# Altium PCB ESE516_PCB.PcbDoc (part 1 of 2)
Units mil, origin at the board's own origin, x right, y up, seen from the top; angles counter-clockwise.
Board outline 3149.61 x 3149.61 mil, 4 copper layers (Top Layer, GroundPlane, PowerPlane, Bottom Layer), stack 58.4 mil thick; 100 components, 68 nets, 304 pads, 8 vias.
Unrouted connection lines stored in the file: 178.
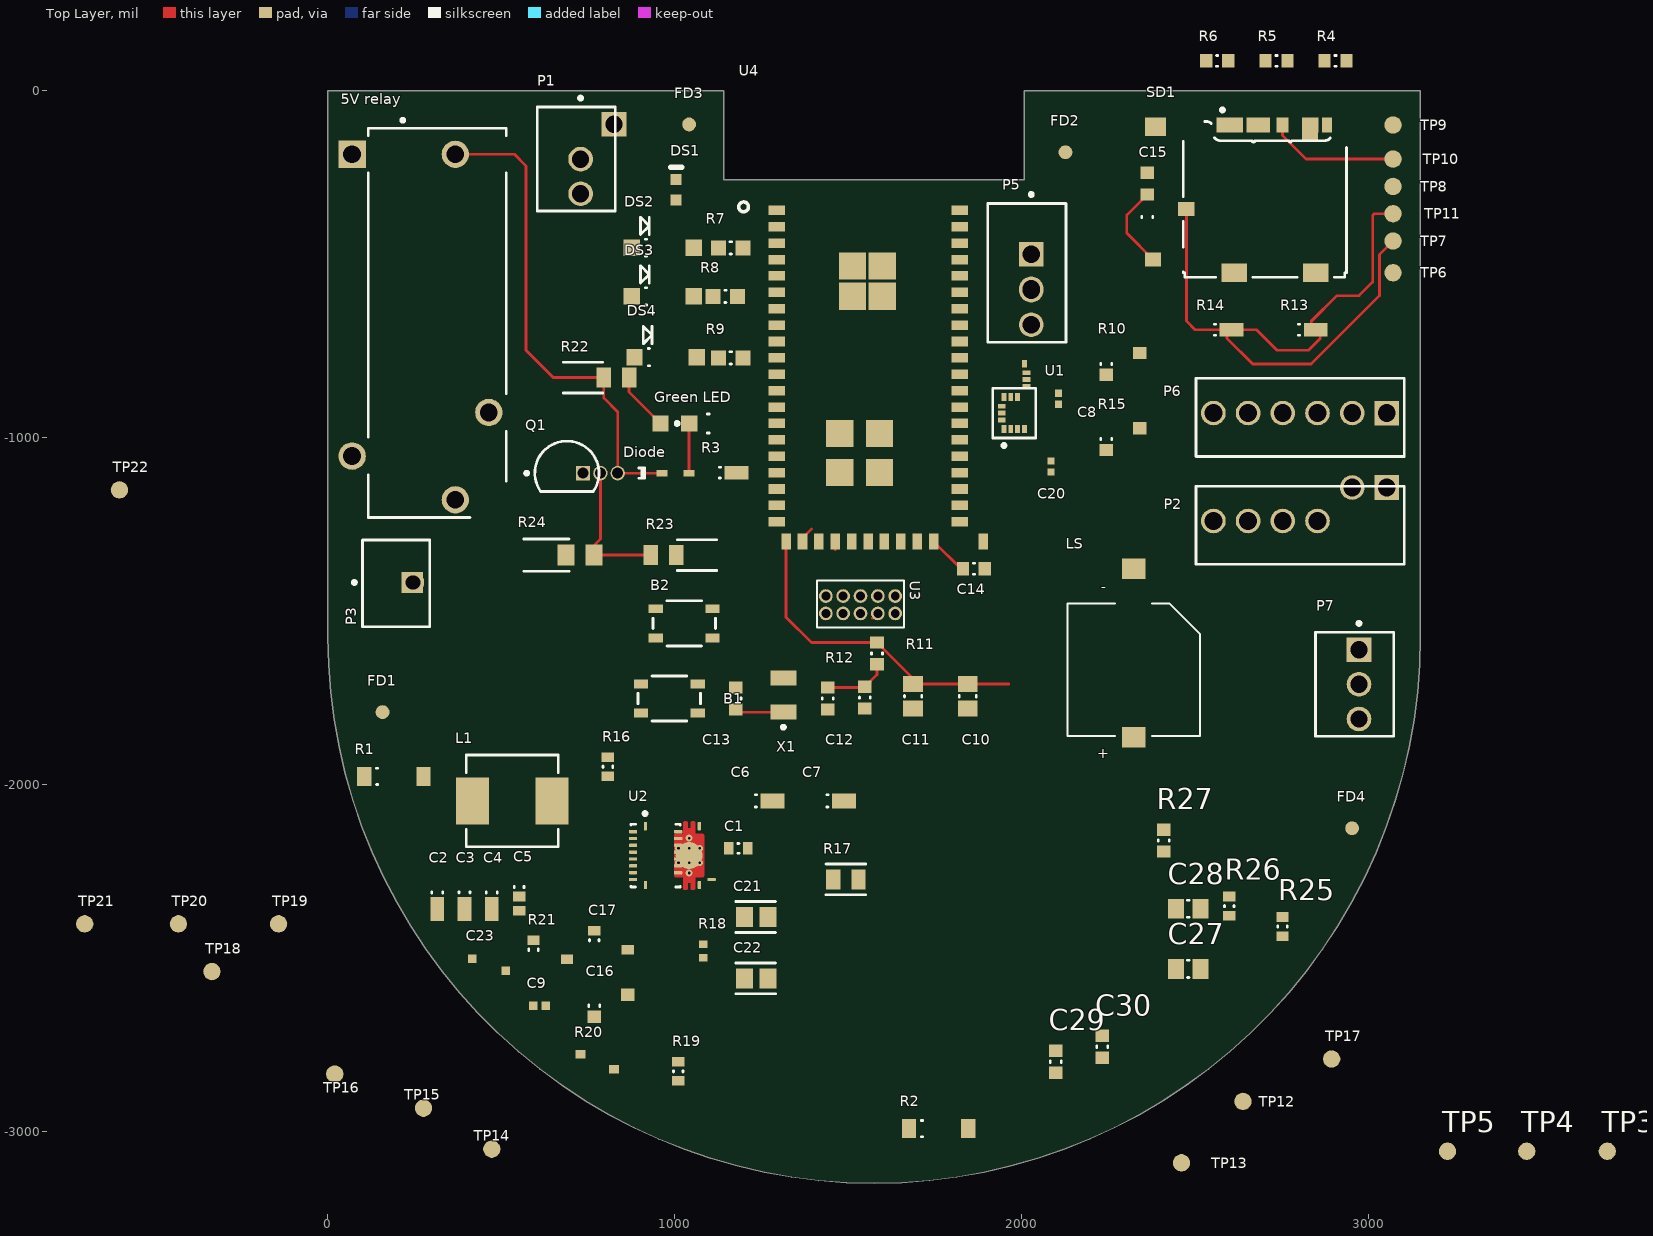
[diagram p0: Top Layer view]
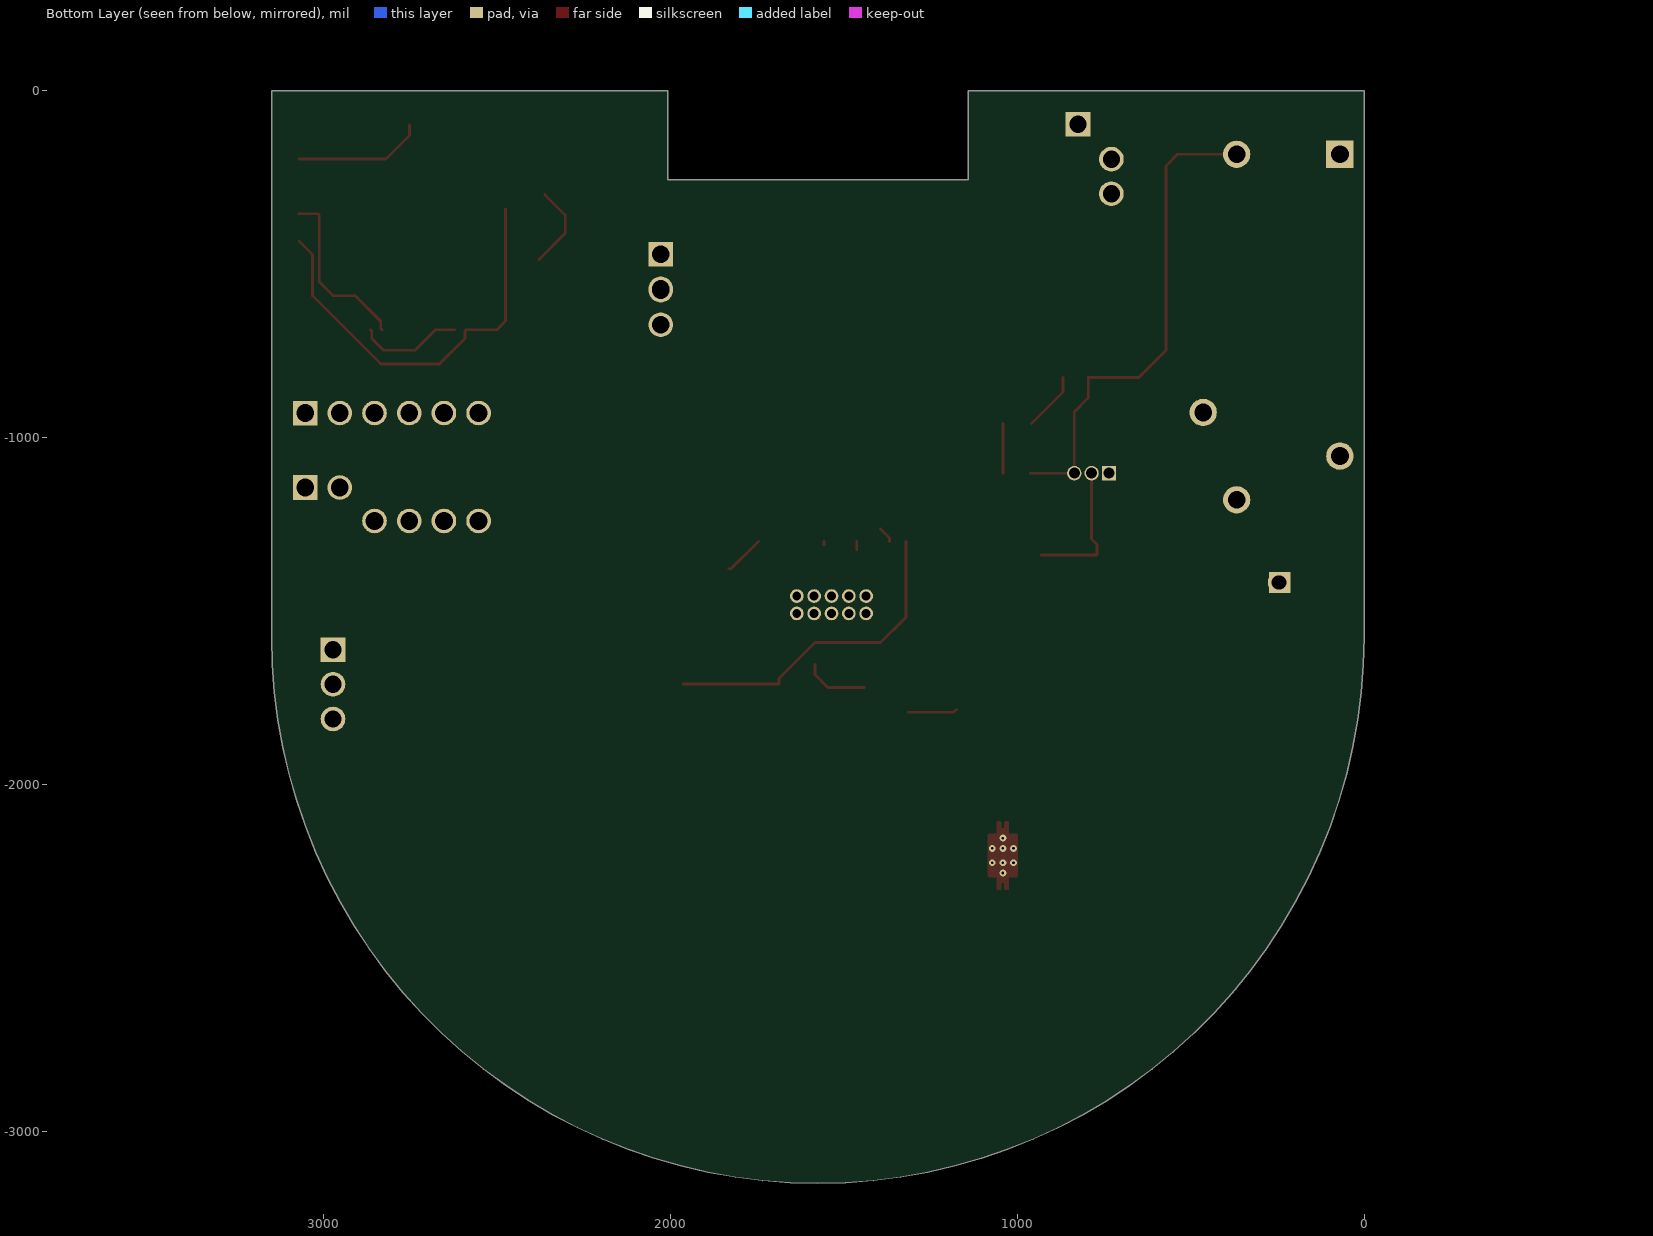
[diagram p1: Bottom Layer view, seen from below]
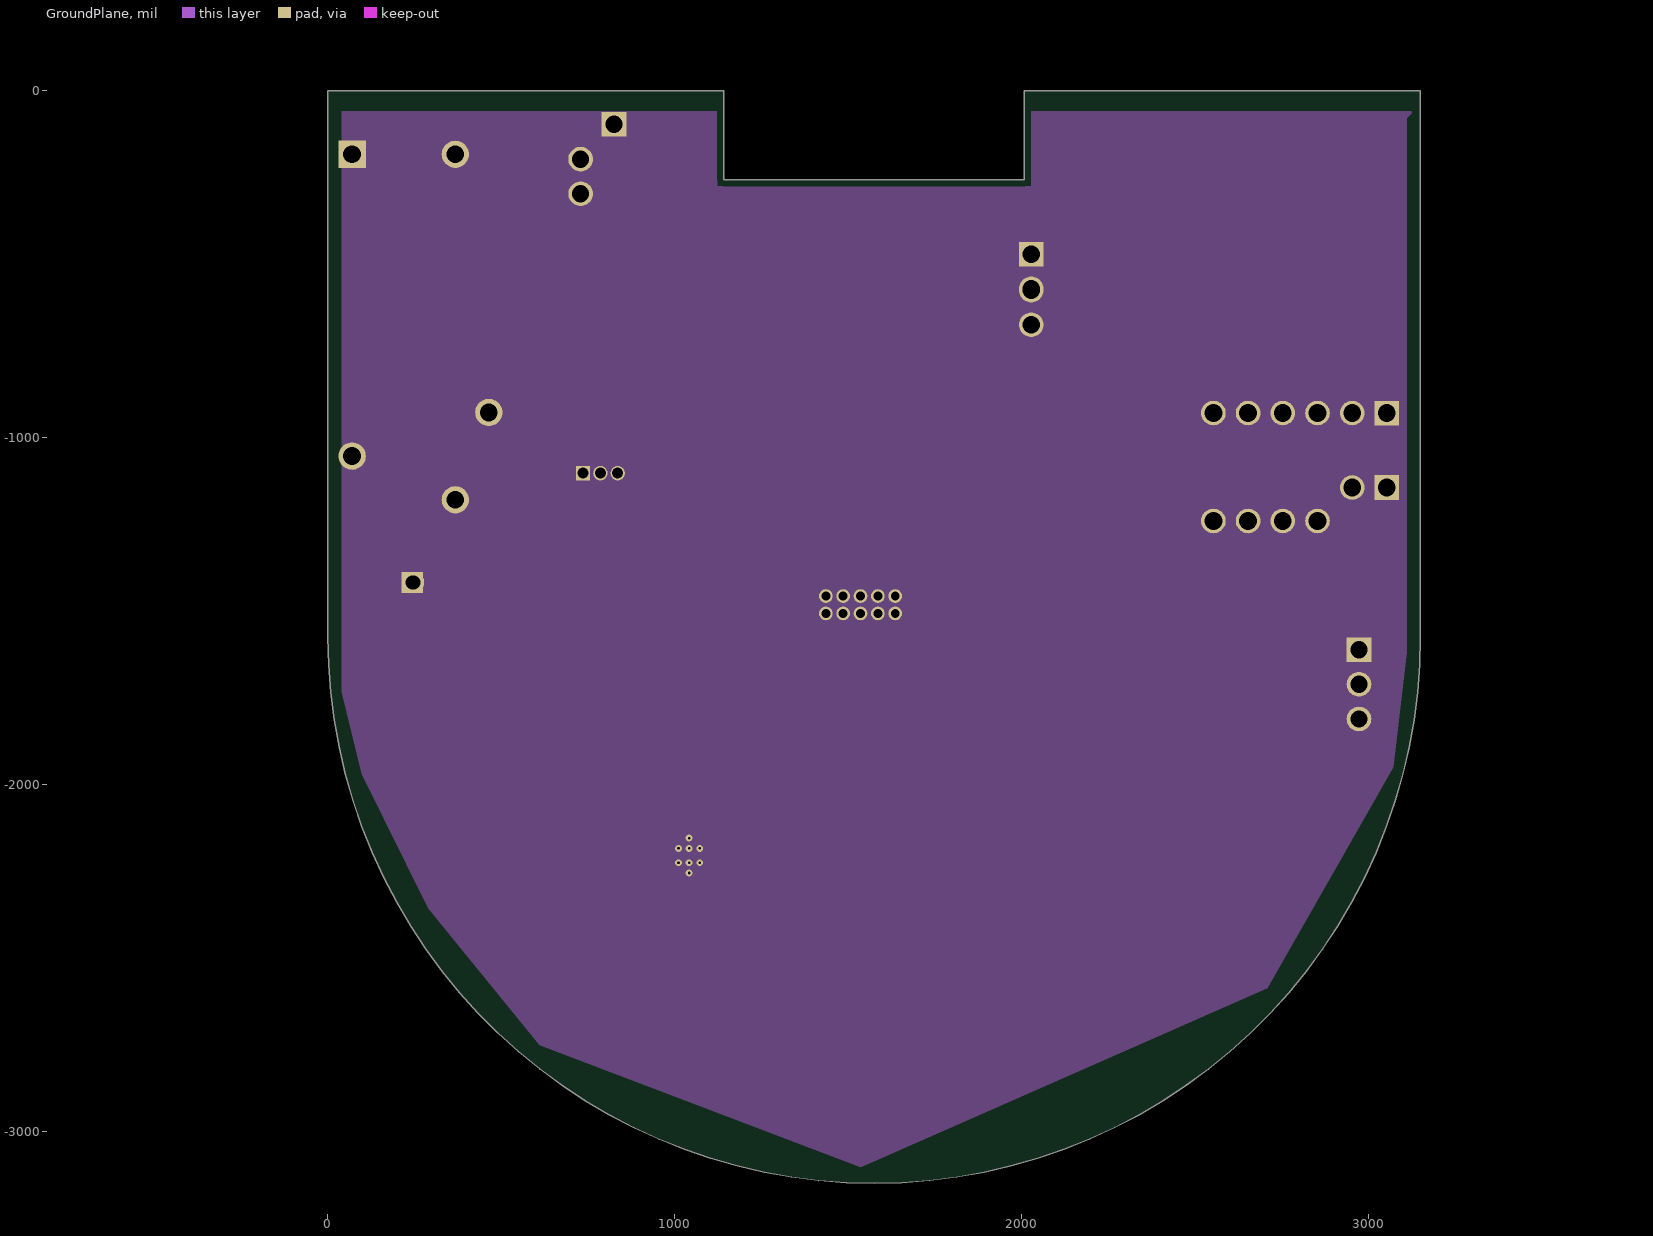
[diagram p2: GroundPlane]

## Layer stack, top to bottom
Top Solder: solder mask 1, Solder Resist, Dk 3.5
Top Layer: signal copper 1.5
Dielectric1: prepreg 13, PP-006, Dk 4.1
GroundPlane: signal copper 0.7
Dielectric 2: core 28, Core-009, Dk 4.5
PowerPlane: signal copper 0.7
Dielectric 3: prepreg 13, PP-006, Dk 4.1
Bottom Layer: signal copper 1.5
Bottom Solder: solder mask 1, Solder Resist, Dk 3.5

## Board outline
2007.87,-255.91 1141.73,-255.91 1141.73,0 0,0 0,-1574.8 2.02,-1654.57 8.08,-1734.12 18.16,-1813.27 32.24,-1891.81 50.27,-1969.53 72.22,-2046.24 98.03,-2121.74 127.62,-2195.84 160.94,-2268.34 197.88,-2339.06 238.35,-2407.82 282.26,-2474.44 329.49,-2538.75 379.91,-2600.59 433.4,-2659.79 489.81,-2716.21 549.02,-2769.7 610.86,-2820.12 675.17,-2867.34 741.79,-2911.25 810.55,-2951.73 881.27,-2988.67 953.77,-3021.98 1027.86,-3051.58 1103.36,-3077.39 1180.07,-3099.34 1257.8,-3117.37 1336.33,-3131.45 1415.48,-3141.53 1495.04,-3147.59 1574.8,-3149.61 1654.56,-3147.59 1734.12,-3141.53 1813.27,-3131.45 1891.81,-3117.37 1969.53,-3099.34 2046.24,-3077.39 2121.74,-3051.58 2195.83,-3021.98 2268.34,-2988.67 2339.06,-2951.73 2407.82,-2911.25 2474.44,-2867.34 2538.75,-2820.12 2600.58,-2769.7 2659.79,-2716.21 2716.21,-2659.79 2769.7,-2600.59 2820.12,-2538.75 2867.34,-2474.44 2911.25,-2407.82 2951.73,-2339.06 2988.67,-2268.34 3021.98,-2195.84 3051.58,-2121.74 3077.38,-2046.24 3099.33,-1969.53 3117.37,-1891.81 3131.44,-1813.27 3141.52,-1734.12 3147.58,-1654.57 3149.6,-1574.8 3149.6,0 2007.87,0

## Design rules (kind name [scope] priority, off if disabled: settings)
AcuteAngle [All] p1: minimum=6.00000000000000E+0001 checktracksonly=TRUE
AssemblyTestPointUsage [All] p1 off: allowmultiple=TRUE
AssemblyTestpoint [All] p1 off: testpointundercomponent=TRUE minsize=30 maxsize=100 preferedsize=60 minholesize=0 maxholesize=40 preferedholesize=32 testpointgrid=1 usegrid=FALSE gridtolerance=0.01 allowsidebottom=TRUE
BoardOutlineClearance "BoardOutlineClearance_Inner Layer" [OnLayer('GroundPlane')OR OnLayer('PowerPlane')] p1: gap=20 ignorepadtopadclearanceinfootprint=FALSE
BoardOutlineClearance BoardOutlineClearance_OuterLayers [All] p2: gap=10 ignorepadtopadclearanceinfootprint=FALSE except(20: SMDPad-OutlineEdge SMDPad-CavityEdge SMDPad-CutoutEdge THPad-OutlineEdge THPad-CavityEdge THPad-CutoutEdge)
Clearance [All] p1: gap=8 ignorepadtopadclearanceinfootprint=FALSE
DiffPairsRouting [All] p1: maxlimit=10 minlimit=6 mostfreqgap=10 toplayer_minwidth=6 toplayer_maxwidth=25 toplayer_prefwidth=15 midlayer1_minwidth=6 midlayer1_maxwidth=25 midlayer1_prefwidth=15 midlayer2_minwidth=6 midlayer2_maxwidth=25 midlayer2_prefwidth=15 bottomlayer_minwidth=6 bottomlayer_maxwidth=25 bottomlayer_prefwidth=15 maxuncoupledlength=500
FabricationTestPointUsage [All] p1 off: valid=0 allowmultiple=TRUE
FabricationTestpoint [All] p1 off: side=2 testpointundercomponent=TRUE minsize=30 maxsize=100 preferedsize=60 minholesize=0 maxholesize=40 preferedholesize=32 testpointgrid=1 allowsidebottom=TRUE usegrid=FALSE gridtolerance=0.01
HoleSize [All] p1: absolutevalues=TRUE maxlimit=150 minlimit=8 maxpercent=80.000 minpercent=20.000
MinimumAnnularRing [All] p1: minimumring=6
MinimumSolderMaskSliver [All] p1: minsoldermaskwidth=2
PlaneClearance [All] p1: clearance=10
PlaneConnect [All] p1: pad.planeconnectstyle=Relief pad.reliefexpansion=20 pad.reliefentries=4 pad.reliefconductorwidth=10 pad.reliefairgap=10 via.planeconnectstyle=Direct via.reliefexpansion=20 via.reliefentries=4 via.reliefconductorwidth=10 via.reliefairgap=10
PolygonConnect [All] p1: thpad.connectstyle=Relief thpad.reliefconductorwidth=10 thpad.reliefentries=4 thpad.polygonreliefangle="90 Angle" thpad.airgapwidth=8 smdpad.connectstyle=Relief smdpad.reliefconductorwidth=10 smdpad.reliefentries=4 smdpad.polygonreliefangle="90 Angle" smdpad.airgapwidth=8 via.connectstyle=Direct via.reliefconductorwidth=10 via.reliefentries=4 via.polygonreliefangle="90 Angle" via.airgapwidth=8
RoutingVias [All] p1: holewidth=8 width=20 viastyle="Through Hole" minholewidth=8 minwidth=20 maxholewidth=30 maxwidth=50
SMDNeckDown [All] p1: percent=90.000
SMDToCorner [All] p1: distance=0
SMDToPlane [All] p1: distance=0
SilkToSilkClearance [All] p1: silktosilkclearance=0
SilkToSolderMaskClearance [IsPad] p1: minsilkscreentomaskgap=2 clearancetoexposedcopper=TRUE
SolderMaskExpansion [All] p1: expansion=2 istentingtop=FALSE
UnRoutedNet [All] p1: checkbadconnections=TRUE
ViasUnderSMD [All] p1: allowed=FALSE
Width [All] p1: maxlimit=20 minlimit=6 preferedwidth=8
18 further rules are at their usual default settings.

## Classes and differential pairs
component class U_Solenoid: "5V relay" Diode "Green LED" P3 Q1 R22 R23 R24
component class U_IMU_LSM6DSOTR: C8 C20 U1
component class U_12V6_Boost: C1 C2 C3 C4 C5 C6 C7 C9 C16 C17 C21 C22 C23 L1 R16 R17 R18 R19 R20 R21 U2
component class U_3V3_BUCK: C27 C28 C29 C30 R25 R26 R27 TP17
component class U_Memory: C15 R13 R14 SD1 TP6 TP7 TP8 TP9 TP10 TP11
component class U_MCU: B1 C10 C11 C12 C13 C14 P6 P7 R11 R12 TP12 TP13 TP14 TP15 TP16 U3 U4 X1
component class MAIN: B2 DS1 DS2 DS3 DS4 FD1 FD2 FD3 FD4 LS P1 P2 P5 R1 R2 R3 R4 R5 R6 R7 R8 R9 R10 R15 TP3 TP4 TP5 TP18 TP19 TP20 TP21 TP22

## Components (designator, comment, footprint, x,y, rotation, side; value= is the part's Value field where it differs from the comment)
"5V relay" "5-1393224-2" FP-5-1393224-2-MFG 314.96,-669.29 r270 top
B1 "PTS810 SJK 250 SMTR LFS" "PTS810 SJK 250 SMTR LFS" 984.25,-1751.97 r0 top
B2 "PTS810 SJK 250 SMTR LFS" "PTS810 SJK 250 SMTR LFS" 1027.19,-1535.43 r0 top
C1 "100nF 10V" CAPC0603(1608)100_L#1 1183.1,-2184.06 r0 top value=100nF
C2 "10uF 10V" CAPC0603(1608)100_N#1 314.96,-2311.02 r270 top value=10uF
C3 "10uF 10V" CAPC0603(1608)100_N#1 393.7,-2311.02 r270 top value=10uF
C4 "10uF 10V" CAPC0603(1608)100_N#1 472.44,-2311.02 r270 top value=10uF
C5 "100nF 10V" CAPC0603(1608)100_L#2 551.18,-2295.28 r270 top value=100nF
C6 "1uF 10V" CAPC0603(1608)100_M 1233.74,-2047.24 r0 top value=1uF
C7 "1uF 10V" CAPC0603(1608)100_M 1439.74,-2047.24 r0 top value=1uF
C8 "100nF 10V" CAPC0402(1005)60_L#1 2106.3,-984.25 r90 top value=100nF
C9 "120pF 16V" CAPC0402(1005)60_N#1 610.24,-2637.8 r0 top value=120pF
C10 "10uF 16V" CAPC0805(2012)145_N 1844.52,-1745.5 r90 top value=10uF
C11 "CAP 10uF 16V" CAPC0805(2012)145_N 1687.04,-1745.5 r90 top value=10uF
C12 "1uF 16V" CAPC0603(1608)100_N#2 1441.01,-1751.97 r90 top value=1uF
C13 "18pF 16V" CAPC0603(1608)100_N#2 1175.23,-1751.97 r270 top value=18pF
C14 "18pF 16V" CAPC0603(1608)100_N#2 1862.2,-1377.95 r180 top value=18pF
C15 "CAP 100nF 16V 0603(1608)" CAPC0603(1608)100_N#3 2362.2,-364.14 r90 top value=100nF
C16 "CAP 8.2nF 10V 0603(1608)" CAPC0603(1608)100_N#4 767.72,-2637.8 r90 top value=8.2nF
C17 "1.2nF 10V" CAPC0603(1608)100_L#3 767.72,-2448.82 r90 top value=1.2nF
C20 "100nF 10V" CAPC0402(1005)60_L#2 1988.19,-1082.68 r90 top value=100nF
C21 "10uF 16V" FP-CL21-IPC_B 1233.3,-2381.89 r0 top
C22 "10uF 16V" FP-CL21-IPC_B 1233.3,-2559.06 r0 top
C23 "120pF 16V" CAPC0402(1005)60_N#2 416.5,-2519.68 r90 top value=120pF
C27 "22uF 10V" CAPC0805(2012)145_N 2480.32,-2531.46 r0 top value=22uF
C28 "22uF 10V" CAPC0805(2012)145_N 2480.31,-2358.27 r0 top value=22uF
C29 "10nF 16V" CAPC0603(1608)100_N#2 2098.43,-2799.21 r90 top value=10nF
C30 "3.9nF 16V" CAPC0603(1608)100_N#2 2232.28,-2755.91 r90 top value=3.9nF
Diode "1N4148WT" FAIR-SOD-523F-2_V 905.51,-1102.36 r180 top
DS1 "LTST-C191KGKT" LITE-ON-LTST-C191KRKT-2_V 1003.94,-285.43 r90 top
DS2 "" LTST-C170GKT_V 917.29,-452.76 r0 top
DS3 "" LTST-C170GKT_V 917.29,-592.6 r0 top
DS4 "" LTST-C170GKT_V 925.2,-767.72 r0 top
FD1 "40x100mm" Fiducial_FT 157.48,-1791.34 r0 top
FD2 "40x100mm" Fiducial_FT 2125.98,-177.17 r0 top
FD3 "40x100mm" Fiducial_FT 1041.31,-96.85 r0 top
FD4 "40x100mm" Fiducial_FT 2952.76,-2125.98 r0 top
"Green LED" "Q62702P5179" FP-LG_R971-MFG 1096.39,-959.02 r0 top
L1 "IHLP2525CZER1R0M01" FP-IHLP-2525CZ-FP_2_413x3-MFG 531.5,-2047.24 r0 top
LS "CMI-9705-0380-SMT-TR" CUI_CMI-9705-0380-SMT-TR 2322.83,-1669.26 r180 top
P1 "640456-3" TECO-640456-3#1 728.35,-196.85 r90 top
P2 "640456-6" TECO-640456-6_V#1 3052.76,-1240.16 r180 top
P3 "2.54mm male header" MOLX-22-23-2021_V 196.85,-1417.32 r0 top
P5 "640456-4" TECO-640456-4 2027.56,-524.61 r90 top
P6 "640456-6" TECO-640456-6_V#2 3052.76,-929 r180 top
P7 "640456-3" TECO-640456-3#2 2972.44,-1711.02 r90 top
Q1 "2N3904" ONSC-TO-92-3-29-11 688.98,-1102.36 r0 top
R1 "Jumper" RESC0805(2012)_N 141.76,-1976.38 r0 top value="0.00 Ohm"
R2 "Jumper" RESC0805(2012)_N 1712.6,-2992.13 r0 top value="0.00 Ohm"
R3 "1K 1%" RESC0603(1608)_N#1 1129.92,-1100.75 r0 top value="1000.00 Ohm"
R4 "27R 1%" RESC0603(1608)_N#2 2904.69,86.31 r0 top value="27.00 Ohm"
R5 "27R 1%" RESC0603(1608)_N#2 2734.69,86.31 r0 top value="27.00 Ohm"
R6 "27R 1%" RESC0603(1608)_N#2 2563.69,86.31 r0 top value="27.00 Ohm"
R7 "1K 1%" RESC0603(1608)_M 1161.42,-452.76 r0 top value="1000.00 Ohm"
R8 "1K 1%" RESC0603(1608)_M 1145.67,-592.6 r0 top value="1000.00 Ohm"
R9 "1K 1%" RESC0603(1608)_M 1161.42,-770.04 r0 top value="1000.00 Ohm"
R10 "10K 1%" RESC0603(1608)_N#3 2244.09,-787.4 r90 top value="10000.00 Ohm"
R11 "10K 1%" RESC0603(1608)_N#2 1582.74,-1622.05 r90 top value="10000.00 Ohm"
R12 "100R 1%" RESC0603(1608)_N#2 1548.04,-1749.43 r90 top value="100.00 Ohm"
R13 "10K 1% 0603(1608)" RESC0603(1608)_N#4 2799.64,-688.98 r180 top value="10000.00 Ohm"
R14 "10K 1% 0603(1608)" RESC0603(1608)_N#4 2557.12,-688.98 r180 top value="10000.00 Ohm"
R15 "10K 1%" RESC0603(1608)_N#3 2244.09,-1003.94 r90 top value="10000.00 Ohm"
R16 "249K 1%" RESC0603(1608)_L#1 807.09,-1948.82 r90 top value="249000.00 Ohm"
R17 "0.00 ohm" FP-RN732A-IPC_B#1 1493.13,-2273.62 r0 top
R18 "825K 1%" RESC0402(1005)_N 1082.03,-2480.31 r90 top value="825000.00 Ohm"
R19 "18K7 1%" RESC0603(1608)_L#1 1009.84,-2826.77 r90 top value="18700.00 Ohm"
R20 "91K 1%" RESC0402(1005)_M 728.35,-2799.21 r90 top value="91000.00 Ohm"
R21 "182K 1%" RESC0603(1608)_L#2 592.52,-2476.38 r90 top value="182000.00 Ohm"
R22 "1k" FP-RN732A-IPC_B#2 735.4,-826.77 r0 top
R23 "1K" FP-RN732A-IPC_B#2 1063.93,-1338.58 r180 top
R24 "10k" FP-RN73R2A-IPC_A 629.92,-1338.58 r0 top
R25 "499K 1%" RESC0603(1608)_L#1 2751.97,-2409.45 r90 top value="499000.00 Ohm"
R26 "499K 1%" RESC0603(1608)_L#1 2598.43,-2350.39 r90 top value="499000.00 Ohm"
R27 "158K 1%" RESC0603(1608)_N#2 2409.45,-2161.42 r90 top value="158000.00 Ohm"
SD1 "104031-0811" MOLX-104031-0811_V 2701.28,-311.52 r180 top
TP3 "0.1\" Pad" PCBComponent#1 3688.3,-3057.28 r90 top
TP4 "0.1\" Pad" PCBComponent#1 3456.02,-3057.28 r90 top
TP5 "0.1\" Pad" PCBComponent#1 3227.67,-3057.28 r90 top
TP6 "0.1\" Pad" PCBComponent#2 2974.44,-524.61 r90 top
TP7 "0.1\" Pad" PCBComponent#1 3070.87,-433.07 r90 top
TP8 "0.1\" Pad" PCBComponent#1 3070.87,-275.59 r90 top
TP9 "0.1\" Pad" PCBComponent#1 3070.87,-98.43 r90 top
TP10 "0.1\" Pad" PCBComponent#1 3070.87,-196.85 r90 top
TP11 "0.1\" Pad" PCBComponent#1 3070.87,-354.33 r90 top
TP12 "0.1\" Pad" PCBComponent#1 2637.8,-2913.39 r90 top
TP13 "0.1\" Pad" PCBComponent#1 2460.63,-3090.55 r90 top
TP14 "0.1\" Pad" PCBComponent#1 472.44,-3051.18 r90 top
TP15 "0.1\" Pad" PCBComponent#1 275.59,-2933.07 r90 top
TP16 "0.1\" Pad" PCBComponent#1 19.69,-2834.65 r90 top
TP17 "0.1\" Pad" PCBComponent#1 2893.7,-2791.34 r90 top
TP18 "0.1\" Pad" PCBComponent#1 -334.65,-2539.37 r90 top
TP19 "0.1\" Pad" PCBComponent#1 -142.2,-2401.57 r90 top
TP20 "0.1\" Pad" PCBComponent#1 -431.2,-2401.57 r90 top
TP21 "0.1\" Pad" PCBComponent#1 -701.2,-2401.57 r90 top
TP22 "0.1\" Pad" PCBComponent#1 -601.2,-1150.46 r90 top
U1 "LSM6DSOTR" FP-LGA-14L-DM00249496-MFG 1978.35,-929 r90 top
U2 "TPS61088RHLT" FP-RHL0020A-MFG 944.88,-2204.72 r0 top
U3 "20021111-00010T4LF" 20021111-00010T4LF 1535.43,-1506.69 r180 top
U4 "SAMW25H18-MR510PB" SAMW25H18-MR510PB 1557.28,-822.03 r90 top
X1 "ABS07-32.768KHz-T" ABRA-ABS07-2_V 1313.02,-1742.13 r90 top

## Footprints (in the part's own frame and the unit in brackets; to place one, negate y for a bottom-side part, rotate by r counter-clockwise, add the part's x,y. Pads: shape width x height; smd on the part's side, far side on the other; paste and mask are expansions set on the pad)
20021111-00010T4LF [mil] "CONN HEADER 10POS UNSHD VERT T/H"
  round 39.6 hole 25.6: 1(-100,-50) 2(-100,0) 3(-50,-50) 4(-50,0) 5(0,-50) 6(0,0) 7(50,-50) 8(50,0) 9(100,-50) 10(100,0)
  silkscreen extent -125,-95 125,40, body extent -125,-92 125,42, height 217
ABRA-ABS07-2_V [mm] "Hand Drawn, 2-Leads, Body 3.2x1.5mm, Pitch 2.5mm"
  rect 1.1x1.9 smd: 1(-1.25,0) 2(1.25,0)
  silkscreen extent -2.47,-0.13 -2.23,0.12, body extent -1.6,-0.75 1.6,0.75, height 0.9
CAPC0402(1005)60_L#1 [mm] "Chip Capacitor, Body 1.0x0.5mm, Height 0.6mm, IPC High Density"
  rect 0.52x0.52 smd: 1(2.049,0) 2(2.849,0)
  body extent -0.55,-0.3 0.55,0.3, height 0.6
CAPC0402(1005)60_L#2 [mm] "Chip Capacitor, Body 1.0x0.5mm, Height 0.6mm, IPC High Density"
  rect 0.52x0.52 smd: 1(-0.4,-2.449) 2(0.4,-2.449)
  body extent -0.55,-0.3 0.55,0.3, height 0.6
CAPC0402(1005)60_N#1 [mm] "Chip Capacitor, Body 1.0x0.5mm, Height 0.6mm, IPC Medium Density"
  rect 0.62x0.62 smd: 1(-0.45,0) 2(0.45,0)
  body extent -0.55,-0.3 0.55,0.3, height 0.6
CAPC0402(1005)60_N#2 [mm] "Chip Capacitor, Body 1.0x0.5mm, Height 0.6mm, IPC Medium Density"
  rect 0.62x0.62 smd: 1(-0.45,-2.449) 2(0.45,0)
  body extent -0.55,-0.3 0.55,0.3, height 0.6
CAPC0603(1608)100_L#1 [mm] "Chip Capacitor, Body 1.6x0.8mm, Height 1.0mm, IPC High Density"
  rect 0.7x0.9 smd: 1(-0.7,0) 2(0.7,0)
  silkscreen extent -0.05,-0.35 0.05,0.35, body extent -0.87,-0.47 0.88,0.48, height 1
CAPC0603(1608)100_L#2 [mm] "Chip Capacitor, Body 1.6x0.8mm, Height 1.0mm, IPC High Density"
  rect 0.7x0.9 smd: 1(1.749,0) 2(0.7,0)
  silkscreen extent -0.05,-0.35 0.05,0.35, body extent -0.87,-0.47 0.88,0.48, height 1
CAPC0603(1608)100_L#3 [mm] "Chip Capacitor, Body 1.6x0.8mm, Height 1.0mm, IPC High Density"
  rect 0.7x0.9 smd: 1(-0.7,-2.449) 2(0.7,0)
  silkscreen extent -0.05,-0.35 0.05,0.35, body extent -0.87,-0.47 0.88,0.48, height 1
CAPC0603(1608)100_M [mm] "Chip Capacitor, Body 1.6x0.8mm, Height 1.0mm, IPC Low Density"
  rect 1.1x1.1 smd: 1(1.549,0) 2(0.9,0)
  silkscreen extent -0.05,-0.45 0.05,0.45, body extent -0.87,-0.47 0.88,0.48, height 1
CAPC0603(1608)100_N#1 [mm] "Chip Capacitor, Body 1.6x0.8mm, Height 1.0mm, IPC Medium Density"
  rect 0.9x1 smd: 1(1.649,0) 2(0.8,0)
  silkscreen extent -0.05,-0.4 0.05,0.4, body extent -0.87,-0.48 0.88,0.47, height 1
CAPC0603(1608)100_N#2 [mm] "Chip Capacitor, Body 1.6x0.8mm, Height 1.0mm, IPC Medium Density"
  rect 0.9x1 smd: 1(-0.8,0) 2(0.8,0)
  silkscreen extent -0.05,-0.4 0.05,0.4, body extent -0.87,-0.48 0.88,0.47, height 1
CAPC0603(1608)100_N#3 [mm] "Chip Capacitor, Body 1.6x0.8mm, Height 1.0mm, IPC Medium Density"
  rect 0.9x1 smd: 1(1.649,0) 2(3.249,0)
  silkscreen extent -0.05,-0.4 0.05,0.4, body extent -0.87,-0.48 0.88,0.47, height 1
CAPC0603(1608)100_N#4 [mm] "Chip Capacitor, Body 1.6x0.8mm, Height 1.0mm, IPC Medium Density"
  rect 0.9x1 smd: 1(-0.8,0) 2(0.8,-2.449)
  silkscreen extent -0.05,-0.4 0.05,0.4, body extent -0.87,-0.48 0.88,0.47, height 1
CAPC0805(2012)145_N [mm] "Chip Capacitor, Body 2.0x1.2mm, Height 1.45mm, IPC Medium Density"
  rect 1.15x1.45 smd: 1(-0.9,0) 2(0.9,0)
  silkscreen extent -0.05,-0.62 0.05,0.63, body extent -1.1,-0.72 1.1,0.73, height 1.45
CUI_CMI-9705-0380-SMT-TR [mm]
  rect 1.7x1.5 smd: N(0,-7.399) P(0,4.95)
  silkscreen extent -4.85,-4.85 4.85,4.85
FAIR-SOD-523F-2_V [mm] "SMD, 2-Leads, Body 1.2x0.8mm, Height 0.7mm"
  rect 0.8x0.5 smd: 1(-3.449,0) 2(-1.449,0)
  silkscreen extent -0.2,-0.38 0.24,0.38, body extent -0.6,-0.4 0.6,0.4, height 0.71
Fiducial_FT [mil]
  round 40 smd paste-30 mask+30: ""(0,0)
FP-5-1393224-2-MFG [mm]
  round 2 hole 1.3 paste-1000 mask+0: 11(9.75,-6.229) 12(6.55,3.78) 14(12.95,1.331) A2(-12.35,1.331)
  rect 2x2 hole 1.3 paste-1000 mask+0: A1(-12.35,-6.229)
  silkscreen extent -14.97,-5.05 14.25,5.05, body extent -14.35,-5.15 14.35,5.15, height 0.25
FP-CL21-IPC_B [mil]
  rect 49.4x57.33 smd paste+0 mask+0: 1(-32.51,0) 2(35.88,0)
  silkscreen extent -57,-44 57,44, body extent -67,-39 67,39, height 10
FP-IHLP-2525CZ-FP_2_413x3-MFG [mil]
  rect 95x135 smd paste+0 mask+0: 1(-115,0) 2(115,0)
  silkscreen extent -132,-132 132,132, body extent -166,-136 166,136, height 10
FP-LG_R971-MFG [mm]
  rect 1.2x1.2 smd paste+0 mask+0: 1(-3.499,0) 2(-1.399,0)
  silkscreen extent -2.4,-0.7 0.08,0.7, body extent -1.75,-0.8 1.75,0.8, height 0.25
FP-LGA-14L-DM00249496-MFG [mm]
  rect 0.575x0.35 smd paste+0 mask+0: 1(-1.162,0.75) 2(-1.162,0.25) 3(-1.162,-0.25) 4(-1.162,-0.75) 8(3.612,-0.75) 9(1.162,-0.25) 10(1.162,0.25) 11(1.162,0.75)
  rect 0.35x0.575 smd paste+0 mask+0: 5(1.949,-0.913) 6(2.449,-0.913) 7(2.949,-0.913) 12(0.5,0.913) 13(0,0.913) 14(-0.5,0.913)
  silkscreen extent -2.5,-1.58 1.83,1.58, body extent -2.05,-1.8 2.05,1.8, height 0.25
FP-RHL0020A-MFG [mm]
  rrect42% 0.24x0.6 smd paste+0 mask+0: 1(-0.75,2.15) 10(-0.75,-2.15) 11(3.199,-2.15) 20(3.199,2.15)
  rrect42% 0.6x0.24 smd paste+0 mask+0: 2(-1.65,1.75) 3(-1.65,1.25) 4(-1.65,0.75) 5(-1.65,0.25) 6(-1.65,-0.25) 7(-1.65,-0.75) 8(-1.65,-1.25) 9(-1.65,-1.75) 12(4.099,-1.75) 13(1.65,-1.25) 14(1.65,-0.75) 15(1.65,-0.25) 16(1.65,0.25) 17(1.65,0.75) 18(1.65,1.25) 19(1.65,1.75)
  round 1.971 smd paste-1000 mask-1000: 21(2.449,0)
  Top Layer region: 1.354,1.455 1.373,1.525 1.424,1.576 1.494,1.595 1.494,1.595 2.004,1.595 2.004,2.38 2.023,2.45 2.074,2.501 2.144,2.52 2.144,2.52 2.204,2.52 2.258,2.509 2.303,2.479 2.334,2.434 2.344,2.38 2.344,2.38 2.344,1.995 2.554,1.995 2.554,2.38 2.573,2.45 2.624,2.501 2.694,2.52 2.694,2.52 2.754,2.52 2.824,2.501 2.875,2.45 2.894,2.38 2.894,2.38 2.894,1.595 3.404,1.595 3.474,1.576 3.525,1.525 3.544,1.455 3.544,1.455 3.544,-1.455 3.525,-1.525 3.474,-1.576 3.404,-1.595 3.404,-1.595 2.894,-1.595 2.894,-2.38 2.875,-2.45 2.824,-2.501 2.754,-2.52 2.754,-2.52 2.694,-2.52 2.624,-2.501 2.573,-2.45 2.554,-2.38 2.554,-2.38 2.554,-1.995 2.344,-1.995 2.344,-2.38 2.325,-2.45 2.274,-2.501 2.204,-2.52 2.204,-2.52 2.144,-2.52 2.074,-2.501 2.023,-2.45 2.004,-2.38 2.004,-2.38 2.004,-1.595 1.494,-1.595 1.424,-1.576 1.373,-1.525 1.354,-1.455 1.354,-1.455
  silkscreen extent -1.8,-2.3 1.8,3.2, body extent -2.05,-2.62 2.05,2.62, height 0.25
FP-RN73R2A-IPC_A [mil]
  rect 49.42x61.27 smd paste+0 mask+0: 1(56.05,0) 2(136.8,0)
  silkscreen extent -65,-46 65,46, body extent -85,-50 85,50, height 10
FP-RN732A-IPC_B#1 [mil]
  rect 41.54x57.33 smd paste+0 mask+0: 1(-36.44,0) 2(36.44,0)
  silkscreen extent -57,-44 57,44, body extent -67,-39 67,39, height 10
FP-RN732A-IPC_B#2 [mil]
  rect 41.54x57.33 smd paste+0 mask+0: 1(59.99,0) 2(132.86,0)
  silkscreen extent -57,-44 57,44, body extent -67,-39 67,39, height 10
LITE-ON-LTST-C191KRKT-2_V [mm] "Chip, 2-Leads, Body 1.6x0.8mm"
  rect 0.8x0.8 smd: 1(-0.75,0) 2(0.75,0)
  silkscreen extent 1.65,-0.4 1.65,0.4, body extent -0.8,-0.4 0.8,0.4, height 0.55
LTST-C170GKT_V [mm] "SMD, 2-Leads, Body 2x1.25mm"
  rect 1.2x1.2 smd: 1(-1.05,0) 2(3.499,0)
  silkscreen extent -0.41,-0.63 0.23,2.25, body extent -1,-0.63 1,0.63, height 1.1
MOLX-22-23-2021_V [mm] "THD, 2-Leads, Body 6.35x4.93mm, Pitch 2.54mm"
  rect 1.55x1.55 hole 1.02: 1(1.179,0)
  round 1.55 hole 1.02: 2(1.27,0)
  silkscreen extent -3.19,-3.25 2.46,3.1, body extent -2.46,-3.25 2.46,3.1, height 10.66
MOLX-104031-0811_V [mm] "Micro SD, 8-Leads, Body 11.95x11.4mm, Pitch 1.1mm"
  rect 0.85x1.1 smd: 1(3.113,-5.412) 2(2.013,-5.412) 3(0.913,-5.412) 4(2.262,-5.412) 5(-1.288,-5.412) 6(0.062,-5.412) 7(-3.487,-5.412)
  rect 0.75x1.1 smd: 8(-4.537,-5.412)
  rect 1.2x1 smd: 9(5.748,0.738) 10(8.197,4.438)
  rect 1.55x1.35 smd: 11(8.022,-5.287)
  rect 1.17x1.8 smd: 12(-3.298,-5.062)
  rect 1.9x1.35 smd: 13(-3.722,5.413) 14(2.248,5.413)
  silkscreen extent -5.97,-6.64 5.98,5.74, body extent -5.97,-5.66 5.98,5.74, height 1.45
ONSC-TO-92-3-29-11 [mm] "TO, 3-Leads, Body Dia 4.7mm, Pitch 1.27mm"
  rect 1.05x1.05 hole 0.8: 1(1.179,0)
  round 1.05 hole 0.8: 2(2.449,0) 3(3.719,0)
  silkscreen extent -3.07,-1.34 2.35,2.35, body extent -2.35,-1.33 2.36,2.36, height 7.87
PCBComponent#1 [mil]
  round 50 smd mask+0: 1(0,0)
  body extent -25,-25 25,25, height 0
PCBComponent#2 [mil]
  round 50 smd mask+0: 1(0,-96.42)
  body extent -25,-25 25,25, height 0
"PTS810 SJK 250 SMTR LFS" [mm] "SWITCH TACTILE SPST-NO 0.05A 16V"
  rect 1.05x0.65 smd: 1(-2.075,1.075) 2(2.075,1.075) 3(-2.075,-1.075) 4(2.075,-1.075)
  silkscreen extent -2.29,-1.65 2.29,1.65, body extent -2.3,-1.6 2.3,1.6, height 2.5
RESC0402(1005)_M [mm] "Chip Resistor, Body 1.0x0.5mm, IPC Low Density"
  rect 0.65x0.75 smd: 1(-0.55,-2.449) 2(0.55,0)
  body extent -0.52,-0.28 0.53,0.28, height 0.4
RESC0402(1005)_N [mm] "Chip Resistor, Body 1.0x0.5mm, IPC Medium Density"
  rect 0.55x0.65 smd: 1(-0.5,0) 2(0.5,0)
  body extent -0.52,-0.27 0.53,0.28, height 0.4
RESC0603(1608)_L#1 [mm] "Chip Resistor, Body 1.6x0.8mm, IPC High Density"
  rect 0.7x0.9 smd: 1(-0.7,0) 2(0.7,0)
  silkscreen extent -0.05,-0.35 0.05,0.35, body extent -0.85,-0.47 0.85,0.47, height 0.6
RESC0603(1608)_L#2 [mm] "Chip Resistor, Body 1.6x0.8mm, IPC High Density"
  rect 0.7x0.9 smd: 1(-0.7,-2.449) 2(0.7,0)
  silkscreen extent -0.05,-0.35 0.05,0.35, body extent -0.85,-0.47 0.85,0.47, height 0.6
RESC0603(1608)_M [mm] "Chip Resistor, Body 1.6x0.8mm, IPC Low Density"
  rect 1.1x1.1 smd: 1(-0.9,0) 2(0.9,0)
  silkscreen extent -0.05,-0.45 0.05,0.45, body extent -0.85,-0.47 0.85,0.47, height 0.6
RESC0603(1608)_N#1 [mm] "Chip Resistor, Body 1.6x0.8mm, IPC Medium Density"
  rect 0.9x1 smd: 1(1.649,0) 2(0.8,0)
  silkscreen extent -0.05,-0.4 0.05,0.4, body extent -0.85,-0.47 0.85,0.47, height 0.6
RESC0603(1608)_N#2 [mm] "Chip Resistor, Body 1.6x0.8mm, IPC Medium Density"
  rect 0.9x1 smd: 1(-0.8,0) 2(0.8,0)
  silkscreen extent -0.05,-0.4 0.05,0.4, body extent -0.85,-0.47 0.85,0.47, height 0.6
RESC0603(1608)_N#3 [mm] "Chip Resistor, Body 1.6x0.8mm, IPC Medium Density"
  rect 0.9x1 smd: 1(-0.8,0) 2(0.8,-2.449)
  silkscreen extent -0.05,-0.4 0.05,0.4, body extent -0.85,-0.47 0.85,0.47, height 0.6
RESC0603(1608)_N#4 [mm] "Chip Resistor, Body 1.6x0.8mm, IPC Medium Density"
  rect 0.9x1 smd: 1(-0.8,0) 2(-1.649,0)
  silkscreen extent -0.05,-0.4 0.05,0.4, body extent -0.85,-0.47 0.85,0.47, height 0.6
RESC0805(2012)_N [mm] "Chip Resistor, Body 2.0x1.3mm, IPC Medium Density"
  rect 1.05x1.4 smd: 1(-0.95,0) 2(3.399,0)
  silkscreen extent -0.05,-0.6 0.05,0.6, body extent -1.1,-0.67 1.1,0.68, height 0.7
SAMW25H18-MR510PB [mm] "RF TXRX MODULE WIFI TRACE ANT"
  rect 2x2 smd: 0(-7.065,-0.839) 0(-7.065,2.085) 0(-4.21,-0.839) 0(-4.21,2.085)
  rect 2x2 smd mask+0.12: 0(5.828,-1.045) 0(5.828,1.137) 0(8.046,-1.045) 0(8.046,1.137)
  rect 0.7x1.2 smd: 1(12.121,6.7) 2(10.921,6.7) 3(9.721,6.7) 4(8.521,6.7) 5(7.321,6.7) 6(6.121,6.7) 7(4.921,6.7) 8(3.721,6.7) 9(2.521,6.7) 10(1.321,6.7) 11(0.121,6.7) 12(-1.079,6.7) 13(-2.279,6.7) 14(-3.479,6.7) 15(-4.679,6.7) 16(-5.879,6.7) 17(-7.079,6.7) 18(-8.279,6.7) 19(-9.479,6.7) 20(-10.679,6.7) 32(-10.679,-6.7) 33(-9.479,-6.7) 34(-8.279,-6.7) 35(-7.079,-6.7) 36(-5.879,-6.7) 37(-4.679,-6.7) 38(-3.479,-6.7) 39(-2.279,-6.7) 40(-1.079,-6.7) 41(0.121,-6.7) 42(1.321,-6.7) 43(2.521,-6.7) 44(3.721,-6.7) 45(4.921,-6.7) 46(6.121,-6.7) 47(7.321,-6.7) 48(8.521,-6.7) 49(9.721,-6.7) 50(10.921,-6.7) 51(12.121,-6.7)
  rect 1.2x0.7 smd: 21(-12.12,6.004) 22(-12.12,4.804) 23(-12.12,3.604) 24(-12.12,2.404) 25(-12.12,1.204) 26(-12.12,0.004) 27(-12.12,-1.196) 28(-12.12,-2.396) 29(-12.12,-3.596) 30(-12.12,-4.796) 31(-12.12,-8.445)
  silkscreen extent 12.02,8.76 12.74,9.47, body extent -12.89,-7.45 20.98,7.46, height 3.37
TECO-640456-3#1 [mm] "Through Hole, 3-Leads, Body 7.62x5.72mm, Pitch 2.54mm"
  rect 1.8x1.8 hole 1.27 paste+0: 1(2.54,-2.449)
  round 1.8 hole 1.27 paste+0: 2(0,0) 3(-2.54,0)
  silkscreen extent -3.81,-2.54 4.59,3.18, body extent -3.81,-2.54 3.81,3.18, height 10.03
TECO-640456-3#2 [mm] "Through Hole, 3-Leads, Body 7.62x5.72mm, Pitch 2.54mm"
  rect 1.8x1.8 hole 1.27 paste+0: 1(2.54,0)
  round 1.8 hole 1.27 paste+0: 2(0,0) 3(-2.54,0)
  silkscreen extent -3.81,-2.54 4.59,3.18, body extent -3.81,-2.54 3.81,3.18, height 10.03
TECO-640456-4 [mm] "Through Hole, 4-Leads, Body 10.16x5.72mm, Pitch 2.54mm"
  rect 1.8x1.8 hole 1.27 paste+0: 1(1.361,0)
  round 1.8 hole 1.27 paste+0: 2(-1.179,0) 3(-1.27,0) 4(-3.81,0)
  silkscreen extent -5.08,-2.54 5.86,3.18, body extent -5.08,-2.54 5.08,3.18, height 10.03
TECO-640456-6_V#1 [mm] "THD, 6-Leads, Body 15.24x5.72mm, Pitch 2.54mm"
  rect 1.8x1.8 hole 1.3: 1(0,-2.449)
  round 1.8 hole 1.3: 2(2.54,-2.449) 3(5.08,0) 4(7.62,0) 5(10.16,0) 6(12.7,0)
  silkscreen extent -1.27,-2.54 13.97,3.18, body extent -1.27,-2.54 13.97,3.18, height 10.03
TECO-640456-6_V#2 [mm] "THD, 6-Leads, Body 15.24x5.72mm, Pitch 2.54mm"
  rect 1.8x1.8 hole 1.3: 1(0,0)
  round 1.8 hole 1.3: 2(2.54,0) 3(5.08,0) 4(7.62,0) 5(10.16,0) 6(12.7,0)
  silkscreen extent -1.27,-2.54 13.97,3.18, body extent -1.27,-2.54 13.97,3.18, height 10.03

## Part data
"5V relay": library part CMP-03395-000017-1, "RELAY GENERAL PURPOSE SPDT 8A 5V", Ambient Temperature Range High=+70°C, Ambient Temperature Range Low=-40°C, Coil Power=223mW, Coil Resistance=112Ω, Coil Voltage=5V, Current Rating=8A, Manufacturer=TE, Automotive=No, Category=Relay, Coil Type=Non-Latching, ComponentLink2Description=Datasheet, ComponentLink2URL=https://www.te.com/usa-en/product-5-1393224-2.html?te_bu=Cor&te_type=other&te_campaign=oct_glo_cor-oct-global-oth-prtnr-fy19-oct-octo-buy-bom_sma-298_2&elqCampaignId=35216, Device Class L1=Electromechanical, Device Class L2=Relays, Device Class L3="Power Relays", Digikey Description="RELAY GENERAL PURPOSE SPDT 8A 5V", Height=12.3mm, Lead Free=Yes, Manufacturer Part Number=5-1393224-2, Number of Contacts=1, Octopart=https://octopart.com/ry212005-te+connectivity-39636608, Package=5-1393224-2, RoHS=TRUE, Throw Configuration=SPDT
B1 B2: "SWITCH TACTILE SPST-NO 0.05A 16V Tactile Switch SPST-NO Top Actuated Surface Mount", Color=White, Current Rating="50 mA", Manufacturer="ITT /  C&K Components", Manufacturer Part Number=PTS810SJK250SMTRLFS, Operating Force="2.6 N", Operating Temperature Range="- 40 C to + 85 C", Supplier Part Number 1=CKN10503CT-ND, Voltage Rating DC="16 VDC", Actuator=Oval, Brand="C&K Components", ComponentLink1Description=https://datasheet.ciiva.com/18514/pts810-4mar13-18514061.pdf, ComponentLink1URL=https://datasheet.ciiva.com/18514/pts810-4mar13-18514061.pdf, ComponentLink2Description=https://datasheet.ciiva.com/18514/pts810-4mar13-18514062.pdf, ComponentLink2URL=https://datasheet.ciiva.com/18514/pts810-4mar13-18514062.pdf, ComponentLink3Description=https://datasheet.ciiva.com/18514/pts810-4mar13-18514063.pdf, ComponentLink3URL=https://datasheet.ciiva.com/18514/pts810-4mar13-18514063.pdf, Contact Form=SPST, Contact Plating=Silver, Factory Pack Quantity=2900, Mounting Direction=Straight, Mounting Style=SMD/SMT, Packaging=Reel, Part # Aliases=Y97LT25B5DBFP, Product Category="Tactile Switches", RoHS=Details, Series=PTS810, Stem Height="2.5 mm", Supplier 1=Digi-Key, Switch Function="OFF - (ON)", Termination Style="J Form Lead", Travel="0.15 mm"
C1: library part CMP-1035-02579-1, "CAP 100nF 10V ±5% 0603 (1608 Metric) Thickness 1mm SMD", Case-EIA=0603, Case-Metric=1608, Rated Voltage="10 V", Tolerance=Â±5%, Max Thickness="1 mm", Technology=SMT
C2 C3 C4: library part CMP-1035-02799-1, "CAP 10uF 10V ±10% 0603 (1608 Metric) Thickness 1mm SMD", Case-EIA=0603, Case-Metric=1608, Rated Voltage="10 V", Tolerance=Â±10%, Max Thickness="1 mm", Technology=SMT
C5: library part CMP-1035-02579-1, Case-EIA=0603, Case-Metric=1608, Rated Voltage="10 V", Tolerance=Â±5%, Max Thickness="1 mm", Technology=SMT
C6 C7: library part CMP-1035-02733-1, "CAP 1uF 10V ±10% 0603 (1608 Metric) Thickness 1mm SMD", Case-EIA=0603, Case-Metric=1608, Rated Voltage="10 V", Tolerance=Â±10%, Max Thickness="1 mm", Technology=SMT
C8 C20: library part CMP-1034-02064-1, "CAP 100nF 10V ±5% 0402 (1005 Metric) Thickness 0.6mm SMD", Case-EIA=0402, Case-Metric=1005, Rated Voltage="10 V", Tolerance=Â±5%, Max Thickness="0.6 mm", Technology=SMT
C9 C23: library part CMP-1034-01262-1, "CAP 120pF 16V ±1% 0402 (1005 Metric) Thickness 0.6mm SMD", Case-EIA=0402, Case-Metric=1005, Rated Voltage="16 V", Tolerance=Â±1%, Max Thickness="0.6 mm", Technology=SMT
C10 C11: library part CMP-1036-04927-1, "CAP 10uF 16V ±10% 0805 (2012 Metric) Thickness 1.45mm SMD", Case-EIA=0805, Case-Metric=2012, Rated Voltage="16 V", Tolerance=Â±10%, Max Thickness="1.45 mm", Technology=SMT
C12: library part CMP-1035-02736-1, "CAP 1uF 16V ±5% 0603 (1608 Metric) Thickness 1mm SMD", Case-EIA=0603, Case-Metric=1608, Rated Voltage="16 V", Tolerance=Â±5%, Max Thickness="1 mm", Technology=SMT
C13 C14: library part CMP-1035-00738-1, "CAP 18pF 16V ±5% 0603 (1608 Metric) Thickness 1mm SMD", Case-EIA=0603, Case-Metric=1608, Rated Voltage="16 V", Tolerance=Â±5%, Max Thickness="1 mm", Technology=SMT
C15: library part CMP-1035-02584-1, "CAP 100nF 16V ±10% 0603 (1608 Metric) Thickness 1mm SMD", Case-EIA=0603, Case-Metric=1608, Rated Voltage="16 V", Tolerance=Â±10%, Max Thickness="1 mm", Technology=SMT
C16: library part CMP-1035-02280-1, "CAP 8.2nF 10V ±5% 0603 (1608 Metric) Thickness 1mm SMD", Case-EIA=0603, Case-Metric=1608, Rated Voltage="10 V", Tolerance=Â±5%, Max Thickness="1 mm", Technology=SMT
C17: library part CMP-1035-01909-1, "CAP 1.2nF 10V ±1% 0603 (1608 Metric) Thickness 1mm SMD", Case-EIA=0603, Case-Metric=1608, Rated Voltage="10 V", Tolerance=Â±1%, Max Thickness="1 mm", Technology=SMT
C21 C22: library part CMP-13271-003194-1, "CL21 Series 0805 10uF 16V ±10% Tolerance X5R Multilayer Ceramic Chip Capacitor", Capacitance=10uF, Case Code (Imperial)=0805, Case Code (Metric)=2012, Dielectric=X5R, Max Operating Temperature=85°C, Min Operating Temperature=-55°C, Package Quantity=2000, Tolerance=10%, Voltage Rating=16V, Case/Package=0805, Depth=1.25mm, Height=1.25mm, Length=2mm, Mount="Surface Mount", Packaging="Tape and Reel", Radiation Hardening=No, Thickness=0.053inch, Width=0.049inch
C27 C28: library part CMP-1036-04943-1, "CAP 22uF 10V ±20% 0805 (2012 Metric) Thickness 1.45mm SMD", Case-EIA=0805, Case-Metric=2012, Rated Voltage="10 V", Tolerance=Â±20%, Max Thickness="1.45 mm", Technology=SMT
C29: library part CMP-1035-02311-1, "CAP 10nF 16V ±10% 0603 (1608 Metric) Thickness 1mm SMD", Case-EIA=0603, Case-Metric=1608, Rated Voltage="16 V", Tolerance=Â±10%, Max Thickness="1 mm", Technology=SMT
C30: library part CMP-1035-02154-1, "CAP 3.9nF 16V ±10% 0603 (1608 Metric) Thickness 1mm SMD", Case-EIA=0603, Case-Metric=1608, Rated Voltage="16 V", Tolerance=Â±10%, Max Thickness="1 mm", Technology=SMT
Diode: library part CMP-0881-00001-1, "High Conductance Fast Switching Diode, 75 V, -55 to 150 degC, 2-Pin SOD523F, RoHS", Manufacturer="Fairchild Semiconductor", Temperature Range="-55 to 150 degC", BVR (IR="5 uA)=75 V Min.", CO="4 pF Max.", ComponentLink1Description="Manufacturer URL", ComponentLink1URL=http://www.fairchildsemi.com/, ComponentLink2Description=Datasheet, ComponentLink2URL=http://www.fairchildsemi.com/ds/1N/1N4148WT.pdf, DatasheetVersion="Rev. A2", IR (VR="75 V)=5 uA Max.", Mounting Technology="Surface Mount", PackageDescription="2-Pin Surface Mount Device, Body 1.2 x 0.8 mm, Height 0.7 mm", PackageReference=SOD-523F-2, PartNumber=1N4148WT, RoHS=TRUE, VF="1 V Max."
DS1: library part CMP-2000-05198-1, "Chip LED, Green, 574 nm, 40 pF, -55 to 85 degC, 2-Pin SMD, RoHS, Tape and Reel", Emitting Color=YellowGreen, Forward Current=30mA, Forward Voltage=2.4V, Manufacturer=Lite-On, Operating Temp Range=-55Cto85C, Operating Temperature Classification=Industrial, Package Type=ChipLed, Power Dissipation=75W, Reverse Voltage=5V, Test Current (It)=20mA, Chip Material=AlGaInP, Datasheet URL=http://download.siliconexpert.com/pdfs/2007/08/26/semi_b/manual/lot/ds/ltst-c191kgkt.pdf, Datasheet Version=Jan-07, DELETED=Compliant, Dominant Wave Length=571nm, High Brightness=Yes, Lens Dimensions=1.1X0.8X0.37mm, Lum Intensity=35mcd, Luminous Intensity=35mcd, Main Category=ChipLED, Manufacturer URL=http://www.us.liteon.com/, Mounting=SurfaceMount, Number of Elements=1, Packaging=TapeandReel, Peak Wavelength=574nm, Pin Count=2, Product Depth (mm)=0.8mm, Product Height (mm)=0.55mm, Product Length (mm)=1.6mm, Rad Hardened=No, Shape Type=Rectangular, Type=Uni-Color, Viewing Angle=130deg
DS2 DS3 DS4: library part CMP-1674-00002-5, "LED Uni-Color Green, 100 mW, 120 mA, -55 to 85 degC, 2-Pin SMD, RoHS, Tape and Reel", Colour=Green, Manufacturer=Lite-On, Max Operating Temperature="85 degC", Min Operating Temperature="-55 degC", Package Quantity=1, ComponentLink1Description="Manufacturer URL", ComponentLink1URL=http://www.us.liteon.com/, ComponentLink2Description=Datasheet, ComponentLink2URL=http://media.digikey.com/pdf/Data%20Sheets/Lite-On%20PDFs/LTST-C170GKT.pdf, DatasheetVersion=03/2003, Height="1.1 mm", Length="2 mm", Mount="Surface Mount", Mounting Technology="Surface Mount", PackageDescription="2-Pin Surface Mount Device, Body 2 x 1.25 mm", PackageReference=C170GKT, Packaging="Tape and Reel", Pins=2, RoHSCompliant=true
FD1 FD2 FD3 FD4: library part CMP-00174-A.4, "Fiducial 40x100mm"
"Green LED": library part CMP-62016-000039-1, "LED GREEN DIFFUSED 0805 SMD", Case Code (Imperial)=0805, Case Code (Metric)=2012, Color=Green, Forward Current=25mA, Forward Voltage=2.2V, Lens Color=White, Max Operating Temperature=85°C, Min Operating Temperature=-30°C, Package Quantity=1, Power Dissipation=65mW, Reverse Voltage=12V, Test Current=20mA, Case/Package=0805, Depth=1.35mm, Dominant Wavelength=570nm, Height=0.9mm, Illumination Color=Green, Length=2.1mm, Lens Size=1.25mm, Lens Style=Diffused, Lens Transparency=Diffused, Luminous Flux=0.1lm, Luminous Intensity=45mcd, Mount="Surface Mount", Number of Elements=1, Number of LEDs=1, Number of Pins=2, Packaging="Tape and Reel", Radiation Hardening=No, Viewing Angle=160°, Width=1.25mm
L1: library part CMP-02424-000599-1, "Commercial Inductors, High Saturation Series 1uH 11A 10mΩ 20%", Case/Package=2525, Current Rating=11A, DC Resistance (DCR)=10mR, Inductance=1uH, Inductance Tolerance=20%, Max Operating Temperature=125°C, Min Operating Temperature=-55°C, Package Quantity=2000, Saturation Current=22A, Self Resonant Frequency=5MHz, Test Frequency=100kHz, Contact Plating=Tin, Core Material=Metal, Depth=6.72mm, Height=3mm, Lead Free="Lead Free", Length=7.24mm, Max DC Current=11A, Military Standard=Not, Mount="Surface Mount", Number of Pins=2, Packaging="Tape and Reel", Radiation Hardening=No, RMS Current (Irms)=11A, Shielding=Shielded, Termination=SMD/SMT, Tolerance=20%, Width=6.47mm
LS: "9.7 mm, 3 Vdc, 80 dB, Surface Mount, Driving Circuit, Magnetic Audio Indicator Buzzer", Package="CUI Inc.", Availability=Unavailable, CUI_purchase_URL=https://www.cuidevices.com/product/audio/buzzers/audio-indicators/cmi-9705-0380-smt-tr?utm_source=snapeda.com&utm_medium=referral&utm_campaign=snapedaBOM, MF="CUI Devices", MP=CMI-9705-0380-SMT-TR, Price=None, SnapEDA_Link=https://www.snapeda.com/parts/CMI-9705-0380-SMT-TR/CUI%20Devices/view-part/3662541/?ref=snap
P1 P7: library part CMP-2000-05418-1, "Male Header, Pitch 2.54 mm, 1 x 3 Position, Height 10.03 mm, Tail Length 3.56 mm, -55 to 105 degC", Color=White, Current, Rating="5 /  / A", Flammability Rating=UL94V-0, Manufacturer="TE Connectivity", Temperature, Operating="-55to+105 /  / degC", Voltage, Rating="250 /  / V", Agency Approvals=CSA,UL, Angle=Straight, Brand/Series=MTA-100Series, Color, Housing=White, Connector Type=MTA-100, Contact Centerline Spacing="0.100 /  / in.", Contact Mating Area Plating=Tin, Contact Plating=Tin, Contact Shape=Square, Contact Termination Area Plating=Tin, Datasheet URL=https://datasheet.ciiva.com/16456/eng-ds-82056-mta-0608-16456886.pdf, Datasheet Version=Jun-08, Length, Overall="0.3 /  / \"", Length, Pin="0.14 /  / \"", Length, Terminal Post="0.14 /  / in.", Manufacturer URL=http://www.te.com/, Material, Contact=CopperAlloy, Material, Housing=Polyester, Mount Angle=Vertical, Mounting Hole Size="0.04 /  / \"", Mounting Type=PCMount, Number of Contacts=3, Number of Positions=3, Number of Rows=1, Pin Spacing="0.1 /  / \"", Primary Type=InterconnectSystem, Size, Post="0.025 /  / in.", Special Features=Pinstrip, Standards=RoHSCompliant,ELVCompliant,UL94V-0, Termination=Solder, Type=PCBPlug
P2 P6: library part CMP-2000-05661-1, "Male Header, Pitch 2.54 mm, 1 x 6 Position, Height 10.03 mm, Tail Length 3.56 mm, -55 to 105 degC, Bulk", Color=White, Current, Rating="5 /  / A", Flammability Rating=UL94V-0, Manufacturer="TE Connectivity", Package Description="Male Header, Pitch 2.54 mm, 1 x 6 Position, Height 10.03 mm, Tail Length 3.56 mm", Temperature, Operating="-55to+105 /  / °C", Voltage, Rating="250 /  / V", Agency Approvals=CSA,UL, Angle=Straight, Brand/Series=MTA-100Series, Color, Housing=White, Connector Type=MTA-100, Contact Centerline Spacing="0.100 /  / in.", Contact Mating Area Plating=Tin, Contact Plating=Tin, Contact Shape=Square, Contact Termination Area Plating=Tin, Datasheet URL=https://datasheet.ciiva.com/25618/0900766b80eb7fdd-25618163.pdf, Datasheet Version="Rev. W, 05/2005", Length, Terminal Post="0.14 /  / in.", Manufacturer URL=http://www.te.com/, Material, Contact=CopperAlloy, Material, Housing=Polyester, Mount Angle=Vertical, Mounting Technology=ThroughHole, Mounting Type=PCMount, Number of Contacts=6, Number of Positions=6, Number of Rows=1, Package Reference=640456-6, Primary Type=InterconnectSystem, Size, Post="0.025 /  / in.", Special Features=Pinstrip, Standards=RoHSCompliant,ELVCompliant,UL94V-0, Termination=Solder, Type=PCBPlug
  P6: Length, Overall="0.6 /  / \"", Length, Pin="0.14 /  / \"", Mounting Hole Size="0.04 /  / \"", Pin Spacing="0.1 /  / \""
P3: library part CMP-1704-00001-1, "Male Header, Pitch 2.54 mm, 1 x 2 Position, Height 10.67 mm, Tail Length 3.56 mm, 0 to 75 degC, RoHS, Bulk", Manufacturer=Molex, PartNumber=22-23-2021, ComponentLink1Description="Manufacturer URL", ComponentLink1URL=http://www.molex.com/, ComponentLink2Description=Datasheet, ComponentLink2URL=https://datasheet.ciiva.com/19454/232266-19454304.pdf, Mounting Technology="Through Hole", PackageDescription="Male Header, Pitch 2.54 mm, 1 x 2 Position, Height 10.67 mm, Tail Length 3.56 mm", PackageReference=22-23-2021
P5: library part CMP-2000-05419-1, "Male Header, Pitch 2.54 mm, 1 x 4 Position, Height 10.03 mm, Tail Length 3.56 mm, RoHS, Bulk", Color=White, Current, Rating="5 /  / A", Flammability Rating=UL94V-0, Manufacturer="TE Connectivity", Temperature, Operating="-55to+105 /  / degC", Voltage, Rating="250 /  / V", Agency Approvals=CSA,UL, Angle=Straight, Brand/Series=MTA-100Series, Color, Housing=White, Connector Type=MTA-100, Contact Centerline Spacing="0.100 /  / in.", Contact Mating Area Plating=Tin, Contact Plating=Tin, Contact Shape=Square, Contact Termination Area Plating=Tin, Datasheet URL=https://datasheet.ciiva.com/16286/eng-ds-82056-mta-0608-16286228.pdf, Datasheet Version=Dec-14, Length, Overall="0.4 /  / \"", Length, Pin="0.14 /  / \"", Length, Terminal Post="0.14 /  / in.", Manufacturer URL=http://www.te.com/, Material, Contact=CopperAlloy, Material, Housing=Polyester, Mount Angle=Vertical, Mounting Hole Size="0.04 /  / \"", Mounting Type=PCMount, Number of Contacts=4, Number of Positions=4, Number of Rows=1, Pin Spacing="0.1 /  / \"", Primary Type=InterconnectSystem, Size, Post="0.025 /  / in.", Special Features=Pinstrip, Standards=RoHSCompliant,ELVCompliant,UL94V-0, Termination=Solder, Type=PCBPlug
Q1: library part CMP-2000-05562-1, "General Purpose Transistor, NPN Silicon, 200 mA, 60 V, -55 to 150 degC, 3-Pin TO-92, RoHS, Bulk", Collector- Base Voltage VCBO=60V, Collector- Emitter Voltage VCEO Max=40V, Collector-Emitter Saturation Voltage=0.3V, Emitter- Base Voltage VEBO=6V, Manufacturer=ONSemiconductor, Maximum DC Collector Current=0.2A, Maximum Operating Temperature=+150C, Maximum Power Dissipation=625mW, Minimum Operating Temperature=-65C, Package / Case=TO-92-3(TO-226), Package Description="3-Pin Transistor Outline, Body 4.825 x 3.685 mm, Pitch 1.27 mm", Package Reference=TO-92-3-29-11, Brand=ONSemiconductor, Configuration=Single, Datasheet URL=https://datasheet.ciiva.com/4725/2n3903-d-285841-4725808.pdf, Datasheet Version="Rev. 8, 08/2012", DC Collector/Base Gain hfe Min=60, Factory Pack Quantity=5000, Gain Bandwidth Product fT=270MHz, Manufacturer URL=http://www.onsemi.com/, Mounting Style=ThroughHole, Mounting Technology=ThroughHole, Packaging=Bulk, Product Category=BipolarTransistors-BJT, RoHS=Details, Transistor Polarity=NPN
R1 R2: library part CMP-1013-00001-1, "Jumper 0805 (2012 Metric)", Case-EIA=0805, Case-Metric=2012, Power=None, Technology=SMT, Tolerance=None
R3 R7 R8 R9: library part CMP-1012-00510-1, "1K 0.1W 1% 0603 (1608 Metric)  SMD", Case-EIA=0603, Case-Metric=1608, Power="0.1 W", Tolerance="1 %", Technology=SMT
R4 R5 R6: library part CMP-1012-00331-1, "27R 0.1W 1% 0603 (1608 Metric)  SMD", Case-EIA=0603, Case-Metric=1608, Power="0.1 W", Tolerance="1 %", Technology=SMT
R10 R11 R13 R14 R15: library part CMP-1012-00623-1, "10K 0.1W 1% 0603 (1608 Metric)  SMD", Case-EIA=0603, Case-Metric=1608, Power="0.1 W", Tolerance="1 %", Technology=SMT
R12: library part CMP-1012-00397-1, "100R 0.1W 1% 0603 (1608 Metric)  SMD", Case-EIA=0603, Case-Metric=1608, Power="0.1 W", Tolerance="1 %", Technology=SMT
R16: library part CMP-1012-00779-1, "249K 0.1W 1% 0603 (1608 Metric)  SMD", Case-EIA=0603, Case-Metric=1608, Power="0.1 W", Tolerance="1 %", Technology=SMT
R17: library part CMP-04015-055125-1, Case Code (Imperial)=0805, Case Code (Metric)=2012, Max Operating Temperature=125°C, Min Operating Temperature=-55°C, Package Quantity=4000, Power Rating=100mW, Temperature Coefficient=50ppm/°C, Tolerance=0.1%, Voltage Rating=100V, Case/Package=0805, Composition="Thin Film", Height=0.5mm, Length=2mm, Packaging="Tape and Reel", Resistance="0.00 ohm", Termination=SMD/SMT, Width=1.2mm
R18: library part CMP-1011-00840-1, "825K 0.063W 1% 0402 (1005 Metric)  SMD", Case-EIA=0402, Case-Metric=1005, Power="0.063 W", Tolerance="1 %", Technology=SMT
R19: library part CMP-1012-00652-1, "18K7 0.1W 1% 0603 (1608 Metric)  SMD", Case-EIA=0603, Case-Metric=1608, Power="0.1 W", Tolerance="1 %", Technology=SMT
R20: library part CMP-1011-00732-1, "91K 0.063W 1% 0402 (1005 Metric)  SMD", Case-EIA=0402, Case-Metric=1005, Power="0.063 W", Tolerance="1 %", Technology=SMT
R21: library part CMP-1012-00764-1, "182K 0.1W 1% 0603 (1608 Metric)  SMD", Case-EIA=0603, Case-Metric=1608, Power="0.1 W", Tolerance="1 %", Technology=SMT
R22 R23: library part CMP-2001-02559-2, "1kΩ ±0.1% 0.1W, 1/10W Chip Resistor 0805 (2012 Metric) Moisture Resistant Thin Film", Case Code (Imperial)=0805, Case Code (Metric)=2012, Max Operating Temperature=125°C, Min Operating Temperature=-55°C, Power Rating=100mW, Resistance=1kR, Temperature Coefficient=25ppm/°C, Tolerance=0.1%, Voltage Rating=100V, Case/Package=0805, Mount="Surface Mount", Packaging="Tape and Reel", Termination=SMD/SMT, Voltage Rating (DC)=100V
R24: library part CMP-04015-068669-1, "10kΩ ±0.5% 0.125W, 1/8W Chip Resistor 0805 (2012 Metric) Moisture Resistant Thin Film"
R25 R26: library part CMP-1012-00815-1, "499K 0.1W 1% 0603 (1608 Metric)  SMD", Case-EIA=0603, Case-Metric=1608, Power="0.1 W", Tolerance="1 %", Technology=SMT
R27: library part CMP-1012-00756-1, "158K 0.1W 1% 0603 (1608 Metric)  SMD", Case-EIA=0603, Case-Metric=1608, Power="0.1 W", Tolerance="1 %", Technology=SMT
SD1: library part CMP-2000-05825-1, "Micro SD Card, RA, -25 to 85 degC, 8-Pin SMD, RoHS, Tape and Reel", Current Rating=500mA, Manufacturer=Molex, Package Description="8-Pin Surface Mount Device, Body 11.95 x 11.4 mm, Pitch 1.1 mm", Voltage Rating=10VAC/DC, Brand=Molex, Card Type=microSD, Contact Material=PhosphorBronze, Contact Plating=Gold, Datasheet URL=http://www.molex.com/pdm_docs/sd/1040310811_sd.pdf, Datasheet Version="Rev. E, 04/2006", Height=1.42mm, Housing Material=LiquidCrystalPolymer(LCP), Insertion - Extraction Style=Push-Pull, Length=11.4mm, Manufacturer URL=http://www.molex.com/, Mating Cycles=10000, Mounting Technology=SurfaceMount, Mounting Type=Standard, Number of Contacts=8, Number of Rows=1Row, Orientation=RightAngle, Package Reference=104031-0811, Packaging=Reel, Pitch=1.1mm, Product=CardConnectors, Product Category=MemoryCardConnectors, RoHS=True, Series=104031, Termination Style=SMD
TP3 TP4 TP5 TP6 TP7 TP8 TP9 TP10 TP11 TP12 TP13 TP14 TP15 TP16 TP17 TP18 TP19 TP20 TP21 TP22: library part "0.1\" Pad-A.4"
U1: library part CMP-12177-000012-1, "CONSUMER MEMS", Manufacturer=STMicroelectronics, Max Supply Voltage=3.6V, Min Supply Voltage=1.62V, Operating Supply Current=0.55mA, Package=LGA-14L-DM00249496, Temperature="-40°C to +85°C", Temperature Range High=+85°C, Temperature Range Low=-40°C, Accel Range=2/4/8/16g, Automotive=No, Category=IC, ComponentLink2Description=Datasheet, ComponentLink2URL=https://www.st.com/resource/en/datasheet/lsm6dso.pdf, Device Class L1=Sensors, Device Class L2="Motion Sensors", Device Class L3="Inertial Measurement Units (IMUs)", Digikey Description="CONSUMER MEMS", Footprint Url=https://www.st.com/content/ccc/resource/technical/document/technical_note/73/17/9c/16/dd/96/4a/01/CD00134799.pdf/files/CD00134799.pdf/jcr:content/translations/en.CD00134799.pdf, Gyro Range=125/250/500/1000/2000°/s, Height=0.86mm, Lead Free=Yes, Manufacturer Part Number=LSM6DSOTR, Mouser Description="iNEMO inertial module: \"always-on\" integrated 3D accelerometer and 3D gyroscope", Octopart=https://octopart.com/lsm6dsotr-stmicroelectronics-81706672, RoHS=TRUE, Sensor Output=I2C,SPI, Sensor Type=Temperature,Accelerometer,Gyroscope
U2: library part CMP-04918-000117-1, "IC REG BOOST ADJ 10A 20VQFN", Manufacturer="Texas Instruments", Max Junction Temp=+125°C, Max Supply Voltage=12V, Min Supply Voltage=2.7V, Nominal Supply Current=1-110uA, Output Current=10A, Output Voltage=4.5-12.6V, Package=RHL0020A, Switching Frequency=200-2200kHz, Temperature="-40°C to +85°C", Temperature Range High=+85°C, Temperature Range Low=-40°C, Automotive=No, Category=IC, ComponentLink2Description=Datasheet, ComponentLink2URL=http://www.ti.com/lit/ds/symlink/tps61088.pdf, Device Class L1="Integrated Circuits (ICs)", Device Class L2="Power Management ICs", Device Class L3="Voltage Regulators - Switching", Digikey Description="IC REG BOOST ADJ 10A 20VQFN", Height=1mm, Lead Free=Yes, Manufacturer Part Number=TPS61088RHLT, Max Duty Cycle=90%, Number Of Outputs=1, Octopart=https://octopart.com/tps61088rhlt-texas+instruments-57155059, Output Type=AdjustableProgrammable, RoHS=TRUE, Switching Topology=Boost
U3: "CONN HEADER 10POS UNSHD VERT T/H", Current Rating="10 A", Manufacturer="Amphenol / FCI", Supplier Part Number 1=609-3712-ND, Voltage Rating="125 V", Brand=FCI, ComponentLink1Description=https://datasheet.ciiva.com/1433/1079612-1433267.pdf, ComponentLink1URL=https://datasheet.ciiva.com/1433/1079612-1433267.pdf, ComponentLink2Description=https://datasheet.ciiva.com/409/20021111-409158.pdf, ComponentLink2URL=https://datasheet.ciiva.com/409/20021111-409158.pdf, ComponentLink3Description=https://datasheet.ciiva.com/5131/20021111-5131386.pdf, ComponentLink3URL=https://datasheet.ciiva.com/5131/20021111-5131386.pdf, ComponentLink4Description=https://datasheet.ciiva.com/9465/20021111-9465402.pdf, ComponentLink4URL=https://datasheet.ciiva.com/9465/20021111-9465402.pdf, Contact Material=Nickel, Contact Plating=Gold, Factory Pack Quantity=93, Housing Material=Plastic, Manufacturer Part Number=20021111-00010T4LF, Mating Post Length="3.05 mm", Mounting Angle=Vertical, Mounting Style="Through Hole", Number of Positions=10, Number of Positions / Contacts=10, Number of Rows=2, Packaging=Tube, Pitch="1.27 mm", Product Category="Headers & Wire Housings", Product Type=Headers, RoHS=Details, Series=Minitek, Stack Height="2.5 mm", Supplier 1=Digi-Key, Termination Post Length="2.3 mm", Termination Style="Through Hole", Type=Unshrouded
U4: "RF TXRX MODULE WIFI TRACE ANT", Current - Receiving=-, Frequency=2.4GHz, Manufacturer=Atmel, Manufacturer Part Number=ATSAMW25H18-MR510PB, Operating Temperature="-40°C ~ 85°C", Package / Case=Module, Power - Output=17dBm, Supplier Part Number 1=ATSAMW25H18-MR510PB-ND, Voltage - Supply="2.7 V ~ 4.2 V", Antenna Type="Integrated, Trace", Category="RF/IF and RFID", ComponentLink1Description=http://www.atmel.com/devices/ATSAMW25.aspx, ComponentLink1URL=http://www.atmel.com/devices/ATSAMW25.aspx, ComponentLink2Description=http://www.farnell.com/datasheets/1965115.pdf, ComponentLink2URL=http://www.farnell.com/datasheets/1965115.pdf, Current - Transmitting=-, Data Rate=65Mbps, Family="RF Transceiver Modules", Memory Size="256kB Flash, 32kB SRAM", Modulation=-, Mounting Type="Surface Mount", Packaging=Tray, Pricing 1="1=19.14 (USD)", Protocol=802.11b/g/n, RF Family/Standard=WiFi, Sensitivity=-95.5dBm, Serial Interfaces="SPI, UART", Series="Xplained Pro", Stock 1=120, Supplier 1=Digikey